# Altium PCB ProyectoIntegrador.PcbDoc
Units mil, origin at the board's own origin, x right, y up, seen from the top; angles counter-clockwise.
Board outline 3937 x 4133.68 mil, 2 copper layers (Top Layer, Bottom Layer); 63 components, 66 nets, 245 pads, 28 vias.
Unrouted connection lines stored in the file: 34.
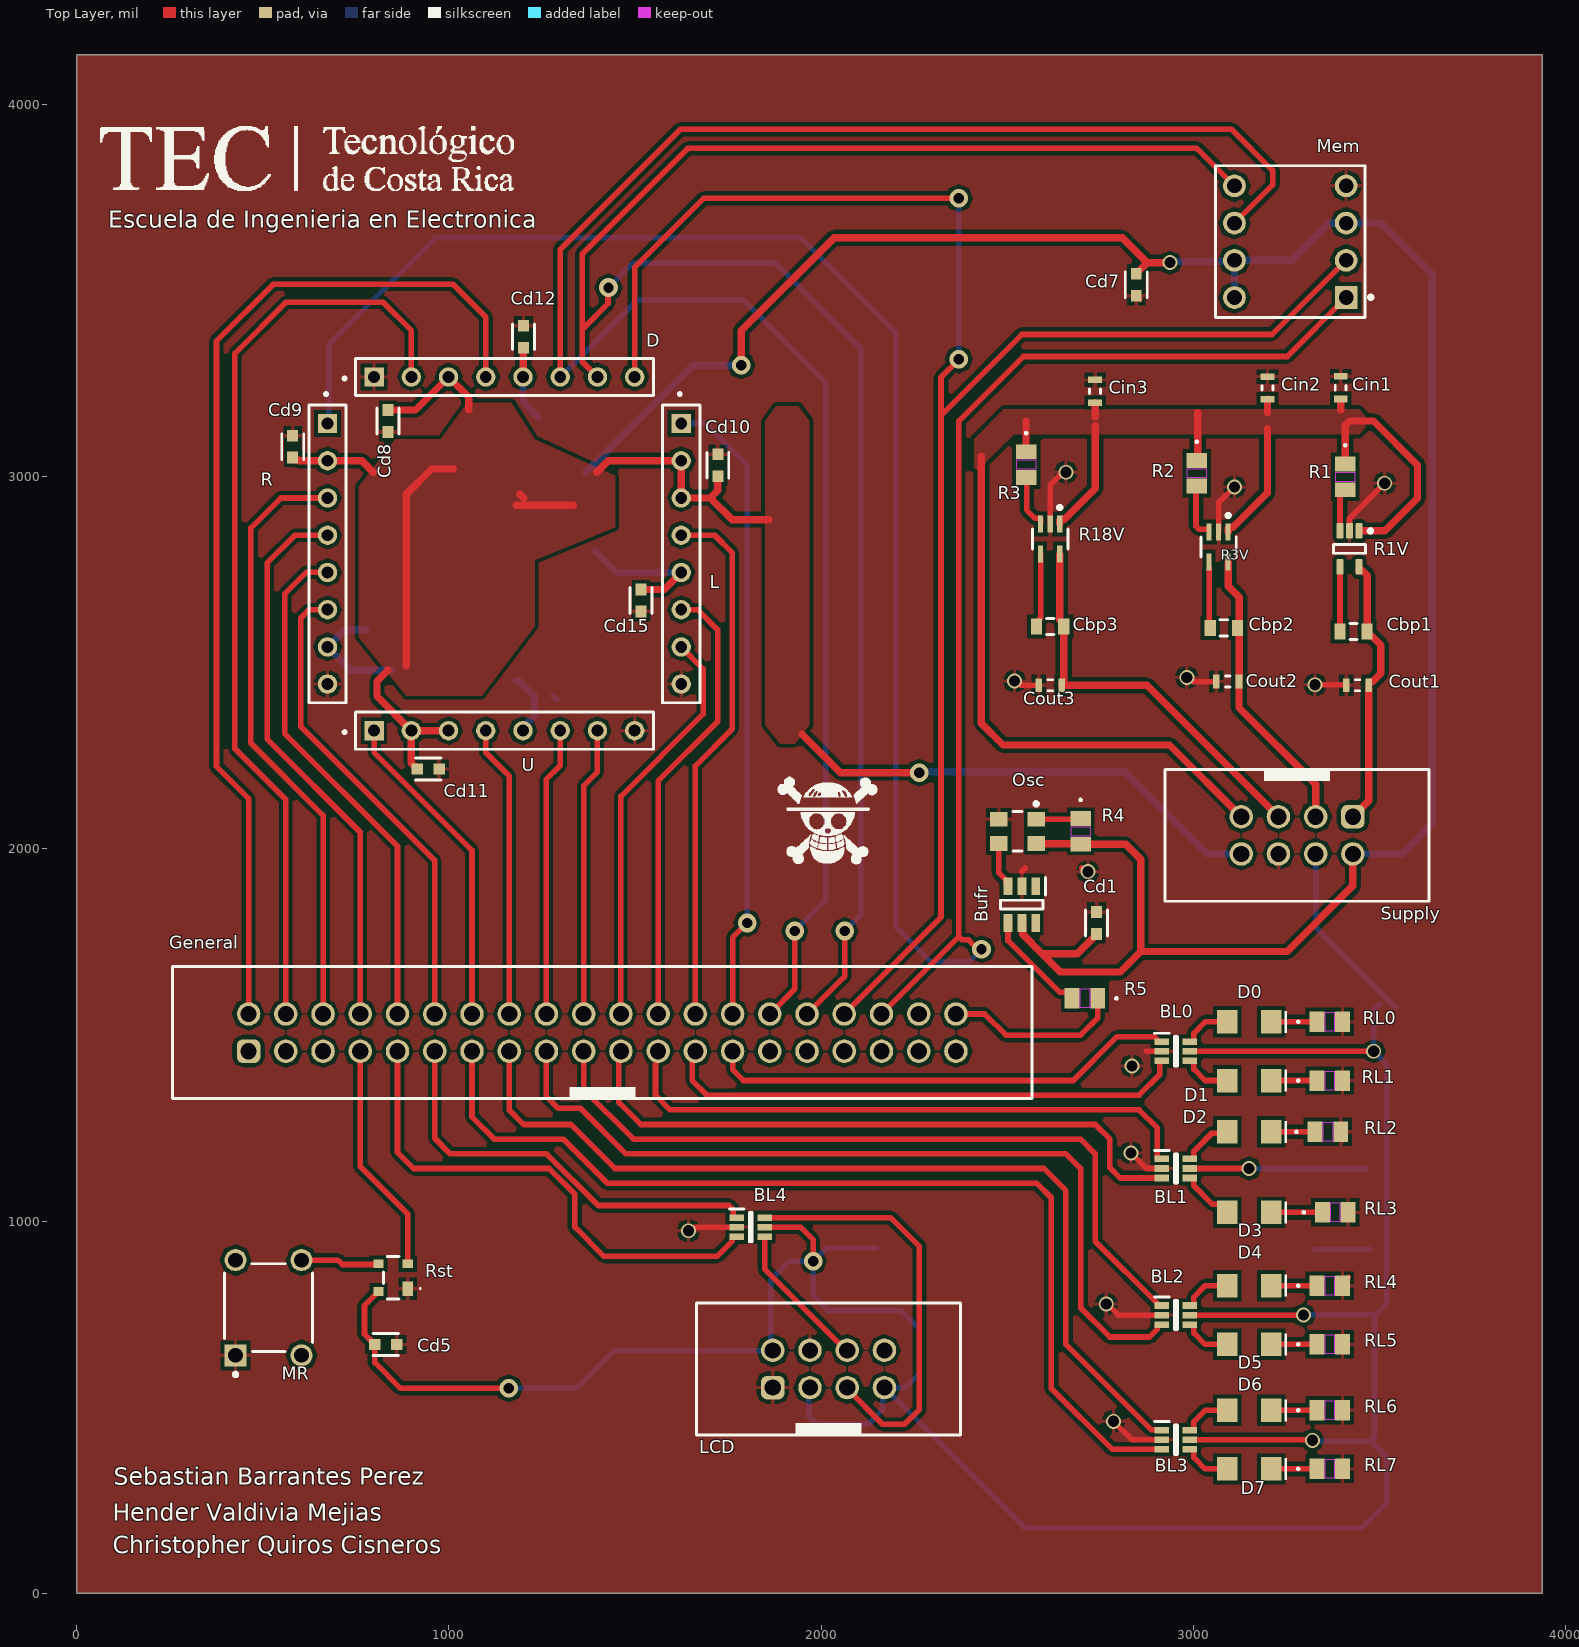
[diagram p0: Top Layer view]
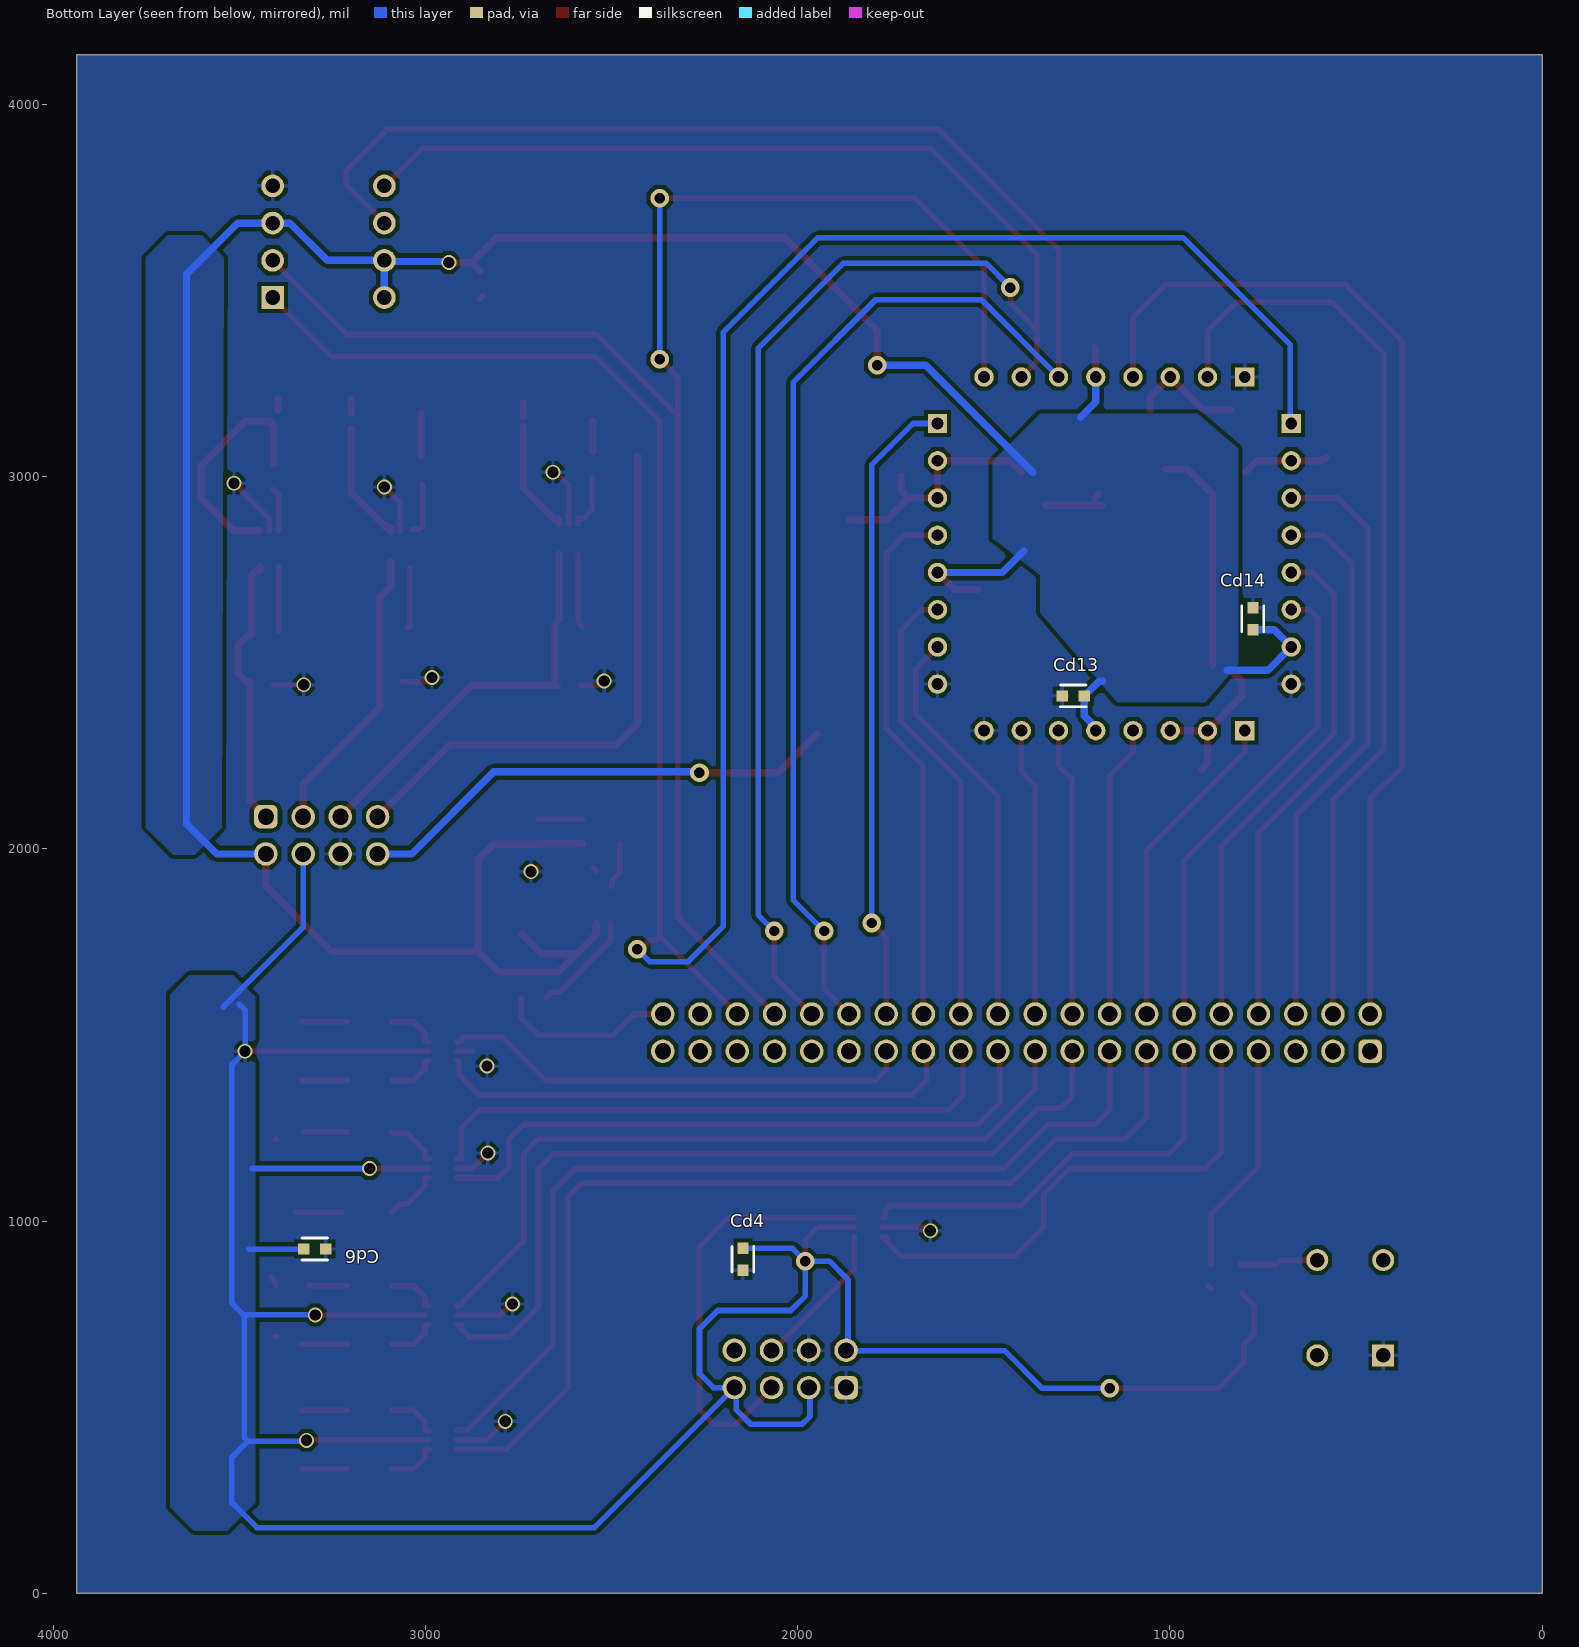
[diagram p1: Bottom Layer view, seen from below]
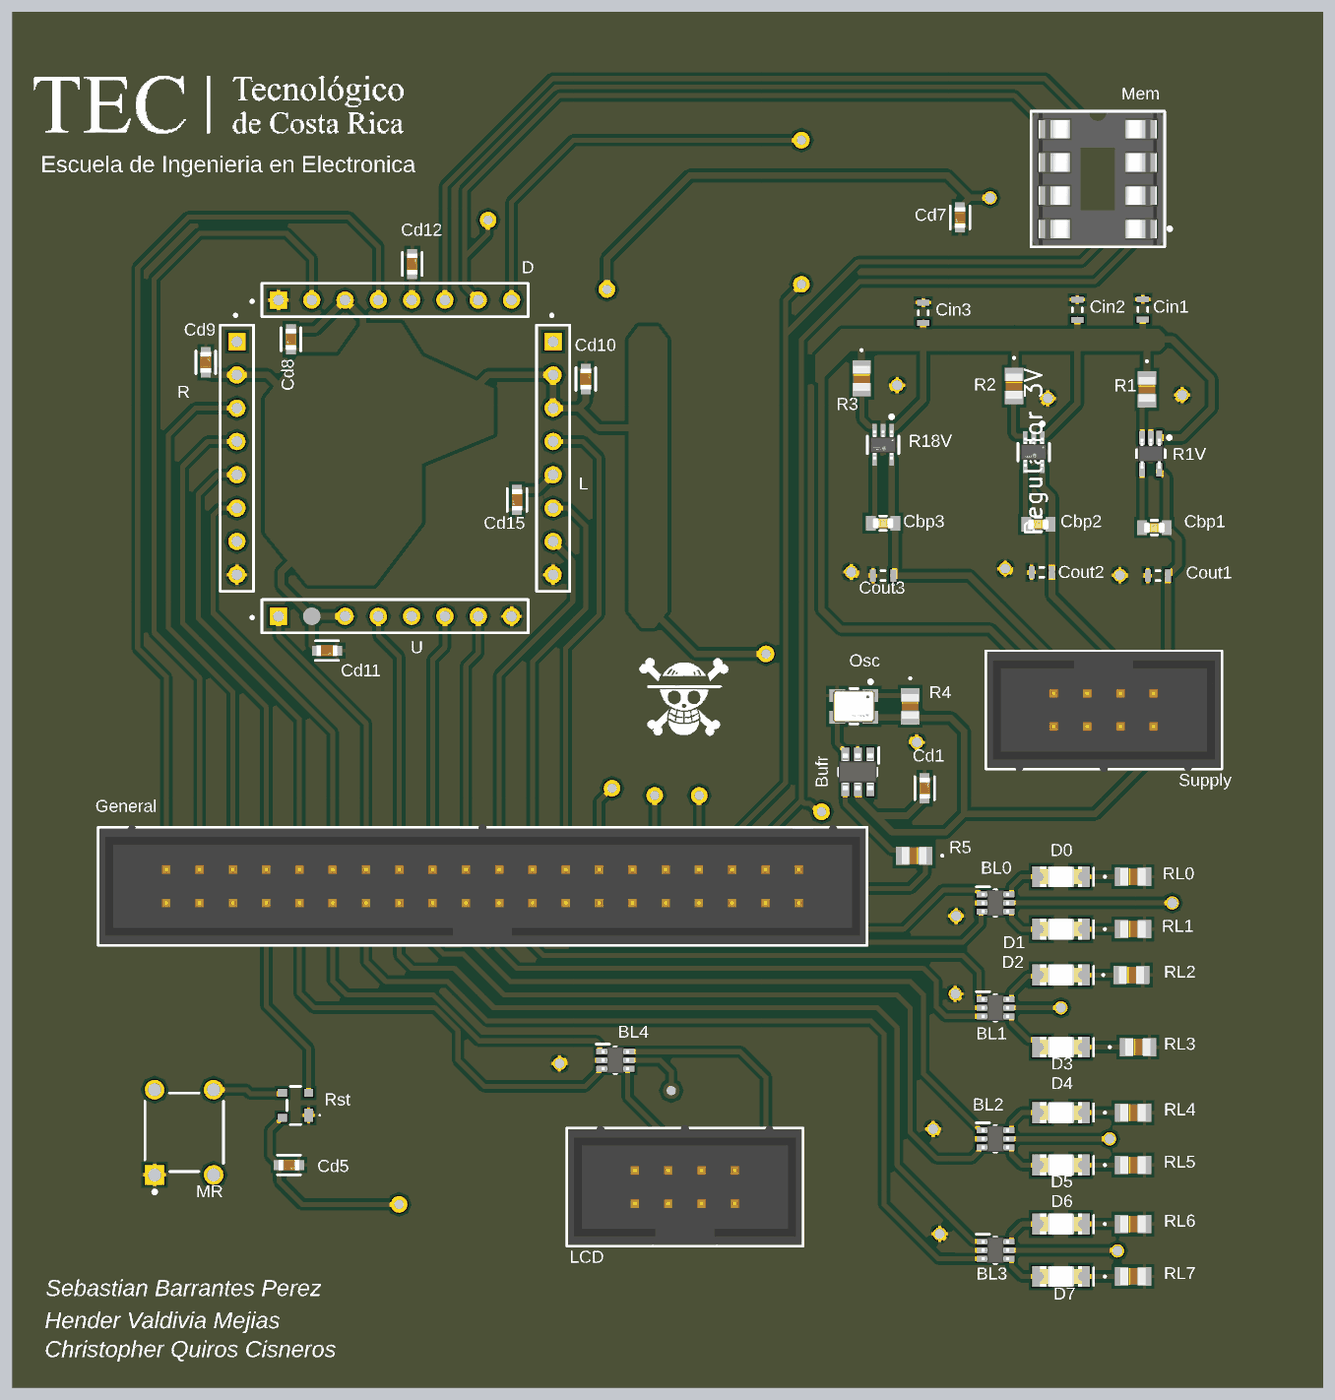
[diagram p2: 3D render of the assembled board from above, using the file's embedded part models]
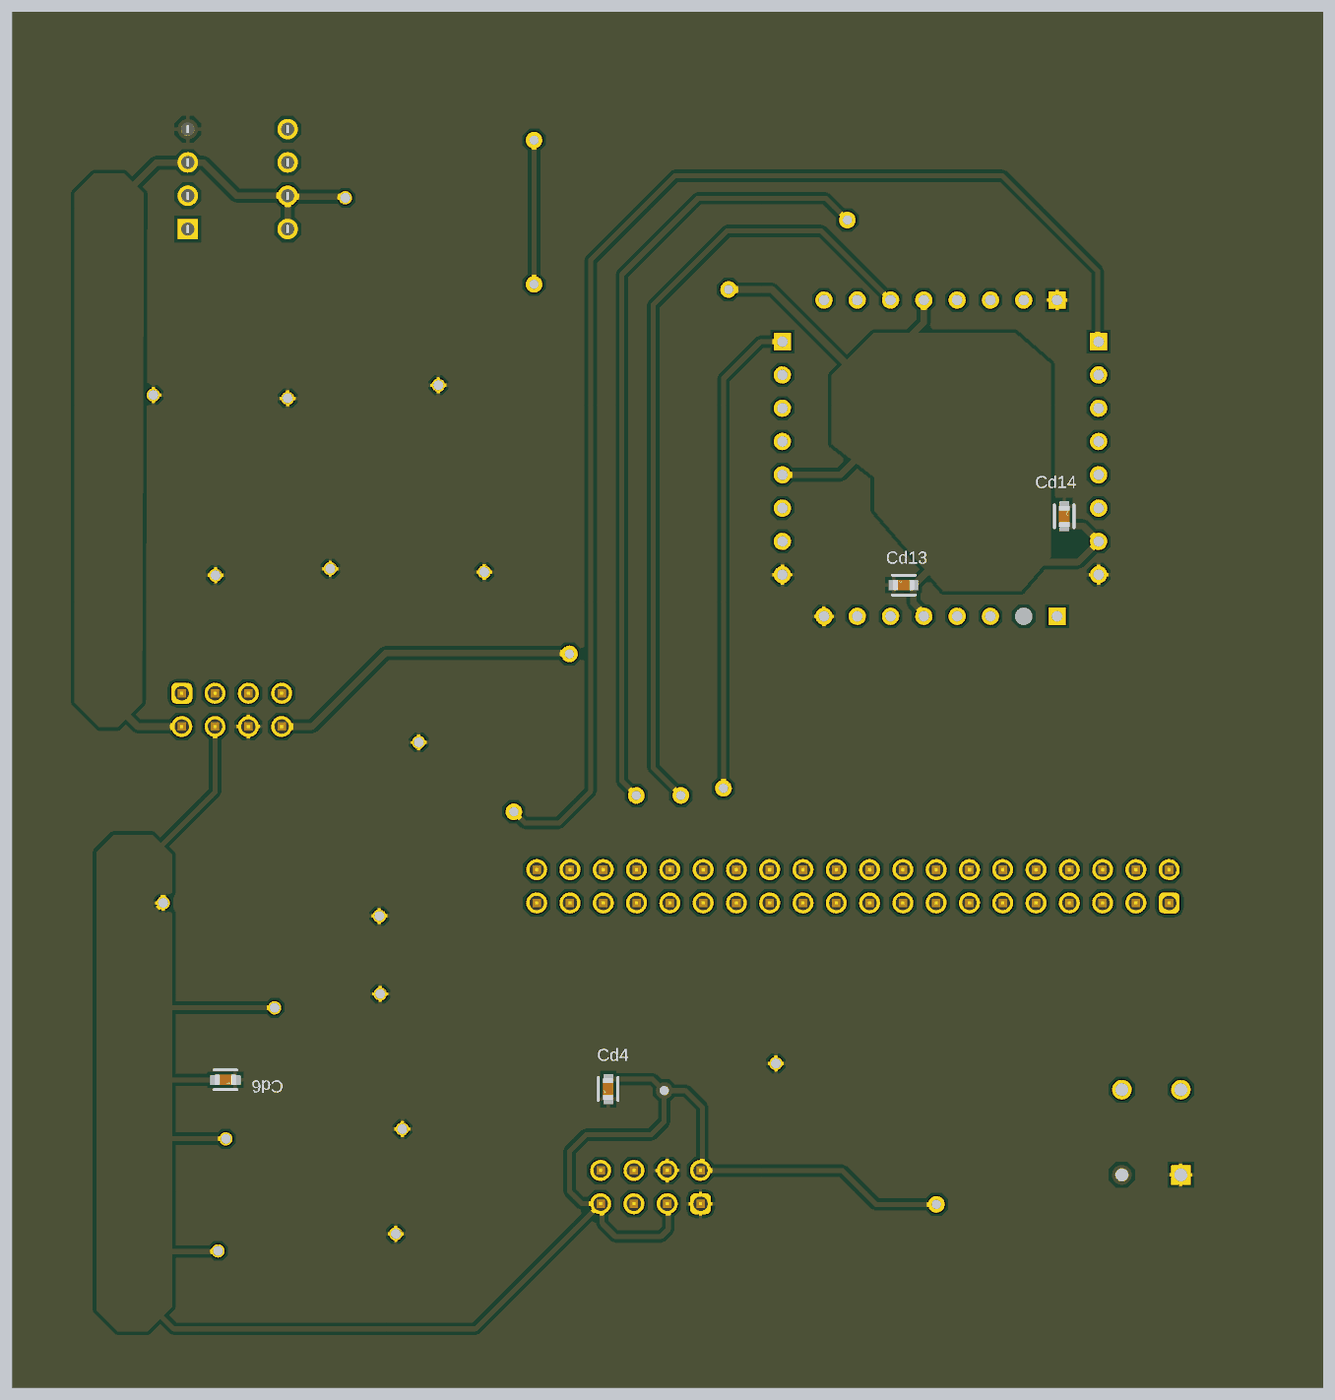
[diagram p3: 3D render of the assembled board from below, using the file's embedded part models]

## Layer stack, top to bottom
Top Solder: solder mask 1, SM-001, Dk 4
Top Layer: signal copper 1.378
Dielectric 1: dielectric 12.6, FR-4, Dk 4.8
Bottom Layer: signal copper 1.378
Bottom Solder: solder mask 1, SM-001, Dk 4

## Board outline
0,0.18 3937,0.18 3937,4133.86 0,4133.86

## Design rules (kind name [scope] priority, off if disabled: settings)
AssemblyTestPointUsage [All] p1: isadvanced=TRUE
AssemblyTestpoint [All] p1: isadvanced=TRUE testpointundercomponent=TRUE minsize=40 maxsize=100 preferedsize=60 minholesize=0 maxholesize=40 preferedholesize=32 testpointgrid=1 usegrid=TRUE gridtolerance=0.01 allowsidetop=TRUE allowsidebottom=TRUE
Clearance Clearance_4 [InNamedPolygon('GND_L02_P017')] p1: isadvanced=TRUE gap=10 ignorepadtopadclearanceinfootprint=TRUE
Clearance Clearance_3 [InNamedPolygon('GND_L01_P020')] p2: isadvanced=TRUE gap=10 ignorepadtopadclearanceinfootprint=TRUE
Clearance Clearance_2 [InNamedPolygon('GND_L02_P002')] p3: isadvanced=TRUE gap=10 ignorepadtopadclearanceinfootprint=FALSE
Clearance Clearance_1 [InNamedPolygon('GND_L01_P012')] p4: isadvanced=TRUE gap=10 ignorepadtopadclearanceinfootprint=TRUE
Clearance Clearance_1 [OnMid vs OnMid] p5: gap=8 ignorepadtopadclearanceinfootprint=FALSE except(2: SMDPad-Fill SMDPad-Poly SMDPad-Region; 5: SMDPad-SMDPad) sourcerule=45 cellrowname=All cellrowtype=0 cellcolname=All cellcoltype=0 innerlayers=TRUE
Clearance Clearance_2 [(ExistsOnLayer('Top Layer') Or ExistsOnLayer('Bottom Layer')) vs (ExistsOnLayer('Top Layer') Or ExistsOnLayer('Bottom Layer'))] p6: gap=8 ignorepadtopadclearanceinfootprint=FALSE except(2: SMDPad-Fill SMDPad-Poly SMDPad-Region; 5: SMDPad-SMDPad) sourcerule=45 cellrowname=All cellrowtype=0 cellcolname=All cellcoltype=0 outerlayers=TRUE
Clearance [All] p7: gap=10 ignorepadtopadclearanceinfootprint=FALSE ismatrix=TRUE
ComponentClearance [All] p1: isadvanced=TRUE gap=10 collisioncheckmode=3 verticalgap=10 showdistances=FALSE
FabricationTestPointUsage [All] p1: isadvanced=TRUE valid=0 allowmultiple=FALSE
FabricationTestpoint [All] p1: isadvanced=TRUE side=3 testpointundercomponent=TRUE minsize=40 maxsize=100 preferedsize=60 minholesize=0 maxholesize=40 preferedholesize=32 testpointgrid=1 allowsidetop=TRUE allowsidebottom=TRUE usegrid=TRUE gridtolerance=0.01
FanoutControl Fanout_BGA [IsBGA] p1: isadvanced=TRUE bgadir=Out bgaviamode=Centered fanoutstyle=Auto fanoutdirection=Alternating viagrid=1 // Fanout_BGA (Default Rule)
FanoutControl Fanout_LCC [IsLCC] p2: isadvanced=TRUE bgadir=Out bgaviamode=Centered fanoutstyle=Auto fanoutdirection=Alternating viagrid=1 // Fanout_LCC (Default Rule)
FanoutControl Fanout_SOIC [IsSOIC] p3: isadvanced=TRUE bgadir=Out bgaviamode=Centered fanoutstyle=Auto fanoutdirection=Alternating viagrid=1 // Fanout_SOIC (Default Rule)
FanoutControl Fanout_Small [(CompPinCount < 5)] p4: isadvanced=TRUE bgadir=Out bgaviamode=Centered fanoutstyle=Auto fanoutdirection=OutThenIn viagrid=1 // Fanout_Small (Default Rule)
FanoutControl Fanout_Default [All] p5: isadvanced=TRUE bgadir=Out bgaviamode=Centered fanoutstyle=Auto fanoutdirection=Alternating viagrid=1 // Fanout_Default (Default Rule)
Height [All] p1: isadvanced=TRUE minheight=0 maxheight=1000 prefheight=500
HoleSize [All] p1: isadvanced=TRUE absolutevalues=TRUE maxlimit=100 minlimit=12 maxpercent=80.000 minpercent=20.000
HoleToHoleClearance [All] p1: isadvanced=TRUE gap=10 allowstackedmicrovias=TRUE
LayerPairs [All] p1: isadvanced=TRUE enforce=TRUE
MinimumSolderMaskSliver [All] p1: isadvanced=TRUE minsoldermaskwidth=5
NetAntennae [All] p1: isadvanced=TRUE netantennaetolerance=0
PasteMaskExpansion [All] p1: isadvanced=TRUE expansion=0
PlaneClearance [All] p1: isadvanced=TRUE clearance=20
PlaneConnect [All] p1: isadvanced=TRUE planeconnectstyle=Relief reliefexpansion=20 reliefentries=4 reliefconductorwidth=10 reliefairgap=10
PolygonConnect [All] p1: connectstyle=Relief reliefconductorwidth=10 reliefentries=4 polygonreliefangle="90 Angle" airgapwidth=10
RoutingCorners [All] p1: isadvanced=TRUE cornerstyle=45-Degree minsetback=100 maxsetback=100
RoutingPriority [All] p1: isadvanced=TRUE routingpriority=0
RoutingVias [All] p1: holewidth=30 width=40 viastyle="Through Hole" minholewidth=30 minwidth=40 maxholewidth=30 maxwidth=40
ShortCircuit [All] p1: isadvanced=TRUE allowed=FALSE
SilkToSilkClearance [All] p1: isadvanced=TRUE silktosilkclearance=10
SilkToSolderMaskClearance [IsPad] p1: isadvanced=TRUE minsilkscreentomaskgap=2 clearancetoexposedcopper=TRUE
SolderMaskExpansion [All] p1: isadvanced=TRUE expansion=4 istentingtop=FALSE
SupplyNets "Schematic Supply Nets_4" [InNet('VDD30')] p1: isadvanced=TRUE voltage=0.000
SupplyNets "Schematic Supply Nets_3" [InNet('VDD18')] p2: isadvanced=TRUE voltage=0.000
SupplyNets "Schematic Supply Nets_2" [InNet('GND')] p3: isadvanced=TRUE voltage=0.000
SupplyNets "Schematic Supply Nets_1" [InNet('VDD10')] p4: isadvanced=TRUE voltage=0.000
UnRoutedNet [All] p1: isadvanced=TRUE
UnpouredPolygon [All] p1: isadvanced=TRUE
Width "Schematic Width Constraint" [InNetClass('Alimentacion')] p1: maxlimit=60 minlimit=15 preferedwidth=19.68 minimp=50.000000 maximp=50.000000 favimp=50.000000
Width [All] p2: maxlimit=15 minlimit=12 preferedwidth=15 minimp=50.000000 maximp=50.000000 favimp=50.000000
4 further rules are at their usual default settings.

## Classes and differential pairs
net class Alimentacion: NetAlimentacion_1 NetAlimentacion_3 NetAlimentacion_5 VDD10 VDD18 VDD30 Vin

## Components (designator, comment, footprint, x,y, rotation, side; value= is the part's Value field where it differs from the comment)
BL0 "74LVC2G17GW,125" SOT65P210X110-6N 2952.76,1456.69 r0 top
BL1 "74LVC2G17GW,125" SOT65P210X110-6N 2952.76,1141.73 r0 top
BL2 "74LVC2G17GW,125" SOT65P210X110-6N 2952.76,748.03 r0 top
BL3 "74LVC2G17GW,125" SOT65P210X110-6N 2952.76,413.39 r0 top
BL4 "74LVC2G17GW,125" SOT65P210X110-6N 1811.02,984.25 r0 top
Bufr "PL133-37TI" SOT95P280X145-6N 2539.37,1850.39 r270 top (schematic designator Buffer_CLK)
Cbp1 "10nF" FP-CGA3E-0_3-0_1-IPC_B 3430.24,2584.02 r0 top
Cbp2 "10nF" FP-CGA3E-0_3-0_1-IPC_B 3081.69,2593.86 r0 top
Cbp3 "10nF" FP-CGA3E-0_3-0_1-IPC_B 2615.35,2597.24 r0 top
Cd1 "0.1uF" FP-0603-L_1_6_0_15-W_0_81-MFG 2740.16,1801.18 r90 top
Cd4 "0.1uF" FP-0603-L_1_6_0_15-W_0_81-MFG 2147.4,897.64 r270 bottom
Cd5 "0.1uF" FP-0603-L_1_6_0_15-W_0_81-MFG 830.71,669.29 r0 top
Cd6 "0.1uF" FP-0603-L_1_6_0_15-W_0_81-MFG 3297.24,925.2 r180 bottom
Cd7 "0.1uF" FP-0603-L_1_6_0_15-W_0_81-MFG 2846.46,3515.75 r270 top
Cd8 "0.1uF" FP-0603-L_1_6_0_15-W_0_81-MFG 836.61,3149.61 r270 top
Cd9 "0.1uF" FP-0603-L_1_6_0_15-W_0_81-MFG 580.71,3080.71 r90 top
Cd10 "0.1uF" FP-0603-L_1_6_0_15-W_0_81-MFG 1722.44,3030.51 r90 top
Cd11 "0.1uF" FP-0603-L_1_6_0_15-W_0_81-MFG 944.88,2214.57 r0 top
Cd12 "0.1uF" FP-0603-L_1_6_0_15-W_0_81-MFG 1200.79,3375.98 r90 top
Cd13 "0.1uF" FP-0603-L_1_6_0_15-W_0_81-MFG 1259.84,2411.42 r0 bottom
Cd14 "0.1uF" FP-0603-L_1_6_0_15-W_0_81-MFG 777.56,2618.11 r90 bottom
Cd15 "0.1uF" FP-0603-L_1_6_0_15-W_0_81-MFG 1515.75,2667.32 r270 top
Cin1 "1uF" CAPC1609X100X15LL20 3395.67,3239.17 r270 top
Cin2 "1uF" CAPC1609X100X15LL20 3198.82,3238.19 r270 top
Cin3 "1uF" CAPC1609X100X15LL20 2736.22,3229.33 r270 top
Cout1 "1uF" CAPC1609X100X15LL20 3440.95,2439.76 r0 top
Cout2 "1uF" CAPC1609X100X15LL20 3091.93,2449.61 r0 top
Cout3 "1uF" CAPC1609X100X15LL20 2615.35,2439.76 r0 top
D "PPTC081LFBN-RC" SAMTEC_TS-108-X-A-1#1 1149.21,3267.72 r0 top (schematic designator SIWA_D)
D0 "150120BS75000" WL-SMCW_1206_150120xx75000 3149.61,1535.43 r180 top
D1 "150120BS75000" WL-SMCW_1206_150120xx75000 3149.61,1377.95 r180 top
D2 "150120BS75000" WL-SMCW_1206_150120xx75000 3149.61,1240.16 r180 top
D3 "150120BS75000" WL-SMCW_1206_150120xx75000 3149.61,1023.62 r180 top
D4 "150120BS75000" WL-SMCW_1206_150120xx75000 3149.61,826.77 r180 top
D5 "150120BS75000" WL-SMCW_1206_150120xx75000 3149.61,669.29 r180 top
D6 "150120BS75000" WL-SMCW_1206_150120xx75000 3149.61,492.13 r180 top
D7 "150120BS75000" WL-SMCW_1206_150120xx75000 3149.61,334.65 r180 top
General "Header General" 61204021621 1412.2,1506.69 r0 top (schematic designator P1)
L "PPTC081LFBN-RC" SAMTEC_TS-108-X-A-1#1 1624.21,2792.72 r270 top (schematic designator SIWA_L)
LCD "61200821621" 61200821621 2020.08,603.15 r0 top
Mem "1-2199298-2" FP-1-2199298-2-MFG 3260.24,3631.1 r90 top (schematic designator MemorySocket)
MR "B3F-1000" OMRON-B3F-1000-4_V 515.75,767.72 r90 top
Osc "ASE3-20.000MHZ-KT" FP-ASE3-MFG 2527.56,2047.24 r180 top (schematic designator Oscilador)
R "PPTC081LFBN-RC" SAMTEC_TS-108-X-A-1#1 674.21,2792.72 r270 top (schematic designator SIWA_R)
R1 "100k" RES_PEP0805-N_VIS 3407.9,2999.42 r270 top
R1V "TPS71710DCKT" DCK0005A_M 3419.29,2806.1 r270 top (schematic designator "Regulador 1V")
R2 "100k" RES_PEP0805-N_VIS 3008.84,3009.26 r270 top
R3 "100k" RES_PEP0805-N_VIS 2550.7,3032.48 r270 top
R3V "MAX8510EXK30+T" FP-X5-1-MFG 3067.79,2811.02 r270 top (schematic designator "Regulador 3V")
R4 "100k" RES_PEP0805-N_VIS 2696.85,2047.24 r270 top
R5 "50" RES_PEP0805-N_VIS 2708.66,1598.43 r180 top
R18V "MAX8510EXK18+T" FP-X5-1-MFG 2615.35,2832.48 r270 top (schematic designator "Regulador 1.8V")
RL0 "50" RES_PEP0805-N_VIS 3366.14,1535.43 r0 top
RL1 "50" RES_PEP0805-N_VIS 3366.14,1377.95 r0 top
RL2 "50" RES_PEP0805-N_VIS 3361.27,1240.16 r0 top
RL3 "50" RES_PEP0805-N_VIS 3380.96,1023.62 r0 top
RL4 "50" RES_PEP0805-N_VIS 3366.14,826.77 r0 top
RL5 "50" RES_PEP0805-N_VIS 3366.14,669.29 r0 top
RL6 "50" RES_PEP0805-N_VIS 3366.14,492.13 r0 top
RL7 "50" RES_PEP0805-N_VIS 3366.14,334.65 r0 top
Rst "APX812-29UG-7" APX81229UG7 850.39,848.43 r90 top (schematic designator Reset)
Supply "61200821621" 61200821621 3278.35,2036.61 r180 top (schematic designator Alimentacion)
U "PPTC081LFBN-RC" SAMTEC_TS-108-X-A-1#2 1149.21,2317.72 r0 top (schematic designator SIWA_U)

## Footprints (in the part's own frame and the unit in brackets; to place one, negate y for a bottom-side part, rotate by r counter-clockwise, add the part's x,y. Pads: shape width x height; smd on the part's side, far side on the other; paste and mask are expansions set on the pad)
61200821621 [mm] "8 pins, straight, gold plating"
  rrect50% 1.6x1.6 hole 1.1: 1(-3.81,-1.27)
  round 1.6 hole 1.1: 2(-3.81,1.27) 3(-1.27,-1.27) 4(-1.27,1.27) 5(1.27,-1.27) 6(1.27,1.27) 7(3.81,-1.27) 8(3.81,1.27)
  silkscreen extent -9.01,-4.5 9.01,4.5, body extent -8.91,-4.42 8.91,4.75, height 9.13
61204021621 [mm] "40 pins, straight, gold plating"
  rrect50% 1.6x1.6 hole 1.1: 1(-24.13,-1.27)
  round 1.6 hole 1.1: 2(-24.13,1.27) 3(-21.59,-1.27) 4(-21.59,1.27) 5(-19.05,-1.27) 6(-19.05,1.27) 7(-16.51,-1.27) 8(-16.51,1.27) 9(-13.97,-1.27) 10(-13.97,1.27) 11(-11.43,-1.27) 12(-11.43,1.27) 13(-8.89,-1.27) 14(-8.89,1.27) 15(-6.35,-1.27) 16(-6.35,1.27) 17(-3.81,-1.27) 18(-3.81,1.27) 19(-1.27,-1.27) 20(-1.27,1.27) 21(1.27,-1.27) 22(1.27,1.27) 23(3.81,-1.27) 24(3.81,1.27) 25(6.35,-1.27) 26(6.35,1.27) 27(8.89,-1.27) 28(8.89,1.27) 29(11.43,-1.27) 30(11.43,1.27) 31(13.97,-1.27) 32(13.97,1.27) 33(16.51,-1.27) 34(16.51,1.27) 35(19.05,-1.27) 36(19.05,1.27) 37(21.59,-1.27) 38(21.59,1.27) 39(24.13,-1.27) 40(24.13,1.27)
  silkscreen extent -29.33,-4.5 29.33,4.5, body extent -29.23,-4.42 29.23,4.75, height 9.13
APX81229UG7 [mm]
  rect 1x0.7 smd: 1(-0.75,-1)
  rect 0.6x0.7 smd: 2(0.95,-1) 3(0.95,1) 4(-0.95,1)
  silkscreen extent -1.45,-1.9 1.45,0.65
CAPC1609X100X15LL20 [mm] "Chip Capacitor, 2-Leads, Body 1.60x0.85mm, IPC High Density"
  rect 0.45x0.95 smd: 1(-0.775,0) 2(0.775,0)
  silkscreen extent -0.15,-0.38 0.15,0.38, body extent -0.9,-0.53 0.9,0.53, height 1
DCK0005A_M [mm] "SOT23, 5-Leads, Body 2.15x1.4mm, Pitch 0.65mm, IPC Low Density"
  rrect22% 1.05x0.45 smd: 1(-1.225,0.65) 2(-1.225,0) 3(-1.225,-0.65) 4(1.225,-0.65) 5(1.225,0.65)
  silkscreen extent -1.35,-1.1 0.3,1.55, body extent -1.14,-1 1.14,1, height 0.94
FP-1-2199298-2-MFG [mm]
  rect 1.55x1.55 hole 1 paste-2539.97 mask+0: 1(-3.81,-3.81)
  round 1.55 hole 1 paste-2539.97 mask+0: 2(-1.27,-3.81) 3(1.27,-3.81) 5(3.81,3.81) 6(1.27,3.81) 8(-3.81,3.81)
  round 1.55 hole 1 paste-2539.97 mask+0.3: 4(3.81,-3.81)
  round 1.55 hole 1 mask+0.102: 7(-1.27,3.81)
  silkscreen extent -5.18,-5.62 5.18,5.1, body extent -5.28,-5.2 5.28,5.2, height 0.25
FP-0603-L_1_6_0_15-W_0_81-MFG [mm]
  rect 0.8x0.75 smd paste+0 mask+0: 1(-0.75,0) 2(0.75,0)
  silkscreen extent -0.87,-0.75 0.87,0.75, body extent -1.25,-0.58 1.25,0.58, height 0.25
FP-ASE3-MFG [mm]
  rect 1.2x1 smd paste+0 mask+0: 1(-1.27,-0.825) 2(1.27,-0.825) 3(1.27,0.825) 4(-1.27,0.825)
  silkscreen extent -1.4,-2 0.3,1.35, body extent -1.97,-1.45 1.97,1.45, height 0.25
FP-CGA3E-0_3-0_1-IPC_B [mm]
  rect 0.756x1.106 smd paste+0 mask+0: 1(-0.925,0) 2(0.925,0)
  silkscreen extent -0.25,-0.55 0.25,0.55, body extent -1.55,-0.8 1.55,0.8, height 0.25
FP-X5-1-MFG [mm]
  rect 1.15x0.35 smd paste+0 mask+0: 1(-1.025,0.65) 2(-1.025,0) 3(-1.025,-0.65) 4(1.025,-0.65) 5(1.025,0.65)
  silkscreen extent -2.27,-1.2 0.67,1.2, body extent -1.7,-1.2 1.7,1.2, height 0.25
OMRON-B3F-1000-4_V [mm] "TH, 4-Leads, Body 6x6mm"
  rect 1.5x1.5 hole 1 paste-2539.97: 1(-3.25,2.25)
  round 1.5 hole 1 paste-2539.97: 2(3.25,2.25) 4(3.25,-2.25)
  round 1.5 hole 1 paste-2539.97 mask+0.102: 3(-3.25,-2.25)
  silkscreen extent -4.67,-3 3,3, body extent -3,-3 3,3, height 4.5
RES_PEP0805-N_VIS [mil]
  rect 40x55 smd paste+0 mask+0: 1(-34.5,0) 2(34.5,0)
  Top Layer keep-out region: -12.5,-25.5 -12.5,25.5 12.5,25.5 12.5,-25.5
  silkscreen extent -87,-3 -82,3, body extent -37,-25 37,25, height 25
SAMTEC_TS-108-X-A-1#1 [mil]
  rect 52x52 / inner round 52 / far side rect 52x52 hole 32: 01(-350,0)
  round 52 hole 32: 02(-250,0) 03(-150,0) 04(-50,0) 05(50,0) 06(150,0) 07(250,0) 08(350,0)
  silkscreen extent -433,-50 400,50
SAMTEC_TS-108-X-A-1#2 [mil]
  rect 52x52 / inner round 52 / far side rect 52x52 hole 32: 01(-350,0)
  round 52 hole 32 paste-99999 mask-99999: 02(-250,0)
  round 52 hole 32: 03(-150,0) 04(-50,0) 05(50,0) 06(150,0) 07(250,0) 08(350,0)
  silkscreen extent -433,-50 400,50
SOT65P210X110-6N [mm]
  rect 1x0.45 smd: 1(-0.95,0.65) 2(-0.95,0) 3(-0.95,-0.65) 4(0.95,-0.65) 5(0.95,0) 6(0.95,0.65)
  silkscreen extent -1.45,-1 0.1,1.22, body extent -1.05,-1 1.05,1, height 1.1
SOT95P280X145-6N [mm]
  rect 1.2x0.6 smd: 1(-1.25,0.95) 2(-1.25,0) 3(-1.25,-0.95) 4(1.25,-0.95) 5(1.25,0) 6(1.25,0.95)
  silkscreen extent -1.85,-1.45 0.3,1.6, body extent -1.4,-1.45 1.4,1.45, height 1.45
WL-SMCW_1206_150120xx75000 [mm] "SMD Mono-color Chip LED, body 3.2x1.6mm"
  rect 1.4x1.6 smd: 1(-1.5,0) 2(1.5,0)
  silkscreen extent -2.6,-0.75 -2.4,0.75, body extent -1.6,-0.8 1.6,0.8, height 0.68

## Part data
BL0 BL1 BL2 BL3 BL4: "Integrated Circuit", Manufacturer_Name=Nexperia, Mouser Part Number=771-LVC2G17GW125, Arrow Part Number=74LVC2G17GW,125, Arrow Price/Stock=https://www.arrow.com/en/products/74lvc2g17gw125/nexperia?utm_currency=USD&region=nac, Datasheet Link=https://assets.nexperia.com/documents/data-sheet/74LVC2G17.pdf, Height=1.1mm, Manufacturer_Part_Number=74LVC2G17GW,125, Mouser Price/Stock=https://www.mouser.co.uk/ProductDetail/Nexperia/74LVC2G17GW125?qs=me8TqzrmIYUC6E0%2FnH98oA%3D%3D
Bufr: "Integrated Circuit", Manufacturer_Name=Microchip, Mouser Part Number=998-PL133-37TI, Arrow Part Number=PL133-37TI, Arrow Price/Stock=https://www.arrow.com/en/products/pl133-37ti/microchip-technology?utm_currency=USD&region=nac, Datasheet Link=http://www.microchip.com/mymicrochip/filehandler.aspx?ddocname=en580976, Height=1.45mm, Manufacturer_Part_Number=PL133-37TI, Mouser Price/Stock=https://www.mouser.co.uk/ProductDetail/Microchip-Technology/PL133-37TI?qs=kh6iOki%2FeLE%2FQlQVb6vWpw%3D%3D
Cbp1 Cbp2 Cbp3: library part CMP-08246-000560-1, "Cap Ceramic 10nF 100V C0G 5% Pad SMD 0603 +125°C Automotive T/R", Case Code (Imperial)=0603, Case Code (Metric)=1608, Dielectric=C0G, Max Operating Temperature=125°C, Min Operating Temperature=-55°C, Package Quantity=4000, Ratings=AEC-Q200, Tolerance=5%, Voltage Rating=100V, Capacitance=10nF, Case/Package=0603, Composition=Ceramic, Height=0.8mm, Lead Free="Lead Free", Length=0.063inch, Mount="Surface Mount", Packaging="Tape and Reel", Termination=SMD/SMT, Thickness=0.035inch, Voltage Rating (DC)=100V, Weight=7.1E-05oz, Width=0.031inch
Cd1 Cd4 Cd5 Cd6 Cd7 Cd8 Cd9 Cd10 Cd11 Cd12 Cd13 Cd14 Cd15: library part CMP-07738-136560482-1, "KGM15BR71H104JT Cap Cer 0.1UF 50V X7R 0603", Capacitance=100nF, Case/Package=0603, Max Operating Temperature=125°C, Min Operating Temperature=-55°C, Tolerance=5%, Voltage Rating=50V, Height=940µm, Material=Ceramic, NexarPartId=136560482
Cin1 Cin2 Cin3 Cout1 Cout2 Cout3: library part CMP-2006-00183-1, Manufacturer="AVX Interconnect / Elco", Part Number=TACL105K006XTA
D L R U: "Description", Manufacturer_Name=Sullins, Copyright="Copyright (C) 2025 Ultra Librarian. All rights reserved.", Manufacturer_Part_Number=PPTC081LFBN-RC, RefDes=RefDes, Type=Type
D0 D1 D2 D3 D4 D5 D6 D7: library part CMP-1426-00015-3, "WL-SMCW SMT Mono-Color Chip LED Waterclear", Case Code (Imperial)=1206, Case Code (Metric)=3216, Color=Blue, Forward Current=100mA, Forward Voltage=3.2V, Manufacturer Package Identifier=LED_1206, Max Operating Temperature=85°C, Max Reverse Voltage (DC)=5V, Min Operating Temperature=-40°C, Test Current=20mA, Case/Package=1206, Dominant Wavelength=470nm, Height=680µm, Length=3.2mm, Lens Style="Clear, Rectangular", Luminous Intensity=145mcd, Mount="Surface Mount", Packaging="Tape and Reel", Peak Wavelength=465nm, REACH SVHC=Unknown, RoHS=Compliant, Viewing Angle=140°, Wavelength=470nm, Width=1.6mm
General: library part CMP-1502-00015-3, Color=Black, Contact Resistance=20mΩ, Current Rating=3A, Insulation Resistance=1GΩ, Max Operating Temperature=105°C, Min Operating Temperature=-40°C, Operating Supply Voltage=250V, Connector Type="Male Pin", Contact Material=Copper, Contact Plating=Gold, Gender=Male, Height=9.25mm, Insulation Material=PBT, Lead Pitch=2.54mm, Length=58.46mm, Mount="Through Hole", NexarPartId=25903616, Number of Contacts=40, Number of Pins=40, Number of Positions=40, Number of Rows=2, Orientation=Vertical, Pitch=2.54mm, REACH SVHC=Unknown, RoHS=Compliant, Row Spacing=2.54mm, Termination=Solder, Voltage Rating=250V
LCD Supply: library part CMP-1502-00006-2, Color=Black, Contact Resistance=20mΩ, Current Rating=3A, Insulation Resistance=1GΩ, Max Operating Temperature=105°C, Min Operating Temperature=-40°C, Operating Supply Voltage=250V, Connector Type="Male Pin", Contact Material=Copper, Contact Plating=Gold, Gender=Male, Insulation Material=PBT, Lead Pitch=2.54mm, Length=17.82mm, Mount="Through Hole", NexarPartId=32855460, Number of Contacts=8, Number of Pins=8, Number of Positions=8, Number of Rows=2, Orientation=Vertical, Pitch=2.54mm, REACH SVHC=Unknown, RoHS=Compliant, Row Spacing=2.54mm, Termination=Solder
Mem: library part CMP-03370-000009-1, "CONN IC DIP SOCKET 8POS TIN", Color=Black, Contact Current Rating=1A, Contact Resistance=20mR, Flammability Rating="UL94 V-0", Insulation Resistance=1GR, Max Operating Temperature=105°C, Min Operating Temperature=-40°C, Package Quantity=60, Connector Type=Pin, Contact Finish - Mating=TIN, Contact Material=Bronze, Contact Plating=Tin, Contact Post Length=3inch, ELV=Compliant, Housing Material=PBT, Lead Free="Lead Free", Lead Pitch=2.54mm, Length=0.4inch, Mating Alignment="Yes (With)", Mount="Through Hole", Number of Contacts=8, Number of Positions=8, Number of Rows=2, Orientation=Straight, Packaging=Rail/Tube, Pitch=2.54mm, Radiation Hardening=No, RoHS Compliant=Yes, Row Spacing=0.3inch, Series="Diplomate DL", Termination="Through Hole"
MR: library part CMP-1677-00002-1, "Tactile Switch, SPST-NO, 0.05 A, 5 to 24 V, -25 to 70 degC, 4-Pin THD, RoHS, Bulk", Capacitance="-45 f", Current Rating="1.5 A", Max Operating Temperature="70 degC", Min Operating Temperature="-40 degC", Package Quantity=1080, Voltage Rating="150 V", ComponentLink1Description="Manufacturer URL", ComponentLink1URL=http://www.omron.com/, ComponentLink2Description=Datasheet, ComponentLink2URL=http://www.omron.com/ecb/products/pdf/en-b3f.pdf, Contact Material=Brass, Contact Plating=Gold, DatasheetVersion=Jan-15, Gender=Female, Height="14.99 mm", Lead Pitch="1.27 mm", Length="18.34 mm", Mount="Through Hole", PackageDescription="4-Pin Through Hole Device, Body 6 x 6 mm", PackageReference=B3F-1000, Packaging=Tray, Pins=8, Radiation Hardening=No, RoHSCompliant=true, Shielding=Shielded, Width="25.4 mm"
Osc: library part CMP-27762-010045-1, "XTAL OSC XO 20.0000MHZ CMOS SMD", Case/Package=SMD/SMT, Frequency=20MHz, Frequency Stability=30ppm, Load Capacitance=15pF, Max Operating Temperature=70°C, Max Supply Current=4mA, Max Supply Voltage=1.89V, Min Operating Temperature=-10°C, Min Supply Voltage=1.71V, Operating Supply Voltage=1.8V, Package Quantity=1000, Depth=2.5mm, Height=0.049inch, Lead Free="Lead Free", Length=3.2mm, Mount="Surface Mount", Number of Pins=4, Packaging="Tape and Reel", Radiation Hardening=No, Series=ASE3, Termination=SMD/SMT, Width=0.098inch
R1 R2 R3 R4 RL0 RL1 RL2 RL3 RL4 RL5 RL6 RL7: library part CMP-00030-123138495-1, "PEP0805Y1003BNTA Resistor High Precision Thin Film 0805 100k Ohm 0.1% 1/2W ±10ppm/°C Molded T/R", NexarPartId=123138495
R1V: library part CMP-0394-00843-2, "Single Output High PSRR LDO, 150 mA, Fixed 1 V Output, 2.5 to 6.5 V Input, with Low IQ, 5-pin SC70 (DCK), -40 to 85 degC, Green (RoHS & no Sb/Br)", Manufacturer="Texas Instruments", Accuracy(%)=3, Code_JEDEC=MO-203, ComponentLink1Description="Manufacturer URL", ComponentLink1URL=http://www.ti.com/, ComponentLink2Description=Datasheet, ComponentLink2URL=http://www.ti.com/general/docs/lit/getliterature.tsp?genericPartNumber=TPS71710&fileType=pdf, ComponentLink3Description="Package Specification", ComponentLink3URL=http://www.ti.com/litv/pdf/mpds025f, DatasheetVersion=SBVS068G, Eco-Plan="Green (RoHS & no Sb/Br)", Fixed Output Options(V)=1, Iout(Max)(A)=0.15, Iq(Typ)(mA)=0.05, Mounting Technology="Surface Mount", PackageDescription="5-Pin Plastic Small-Outline, Body 2 x 1.25 mm, Pitch 0.65 mm", PackageReference=DCK0005A, PackageVersion=4093553-3/G, PartNumber=TPS71710DCKT, SubFamily="Single Channel LDO", Vdo(Typ)(mV)=170, Vin(Max)(V)=6.5, Vin(Min)(V)=2.5, Vout Adj(Max)(V)=1, Vout Adj(Min)(V)=1
R3V: library part CMP-0246-00520-2, "IC REG LINEAR 3V 120MA SC70-5", Case/Package=SC, Dropout Voltage=120mV, Input Bias Current=40uA, Max Input Voltage=6V, Max Operating Temperature=85°C, Max Output Current=120mA, Max Power Dissipation=247mW, Min Current Limit=130mA, Min Input Voltage=2V, Min Operating Temperature=-40°C, Nominal Output Voltage=3V, Package Quantity=2500, Power Supply Rejection Ratio (PSRR)=54dB, Quiescent Current=90uA, Reference Voltage=1.225V, Accuracy=2%, Lead Free="Lead Free", Mount="Surface Mount", Number of Outputs=1, Number of Pins=5, Number of Regulators=1, Output Configuration=Positive, Output Current=120mA, Output Type=Fixed, Output Voltage=3V, Packaging="Tape and Reel", Polarity=Positive, Radiation Hardening=No, RoHS Compliant=Yes, Series=-
R5: library part CMP-00030-123138495-1, "PEP0805Y1003BNTA Resistor High Precision Thin Film 0805 50 Ohm 0.1% 1/2W ±10ppm/°C Molded T/R", NexarPartId=123138495
R18V: library part CMP-0246-00401-2, "IC REG LINEAR 1.8V 120MA SC70-5", Case/Package=SC, Input Bias Current=40uA, Max Input Voltage=6V, Max Operating Temperature=85°C, Max Output Current=120mA, Max Power Dissipation=247mW, Min Current Limit=130mA, Min Input Voltage=2V, Min Operating Temperature=-40°C, Nominal Output Voltage=1.8V, Package Quantity=2500, Power Supply Rejection Ratio (PSRR)=54dB, Quiescent Current=90uA, Reference Voltage=1.225V, Accuracy=2%, Lead Free="Lead Free", Mount="Surface Mount", Number of Outputs=1, Number of Pins=5, Number of Regulators=1, Output Configuration=Positive, Output Current=120mA, Output Type=Fixed, Output Voltage=1.8V, Packaging="Tape and Reel", Polarity=Positive, RoHS Compliant=Yes, Series=-
Rst: "I_O=20mA", Manufacturer_Name="Diodes Incorporated", Mouser Part Number=621-APX812-29UG-7, Arrow Part Number=APX812-29UG-7, Arrow Price/Stock=https://www.arrow.com/en/products/apx812-29ug-7/diodes-incorporated, Datasheet Link=https://www.diodes.com//assets/Datasheets/APX811_812.pdf, Height=1.1mm, Manufacturer_Part_Number=APX812-29UG-7, Mouser Price/Stock=https://www.mouser.co.uk/ProductDetail/Diodes-Incorporated/APX812-29UG-7?qs=uwE%252BXfKqZqTVBV%252BbZr8J2A%3D%3D

## Via types
v1: diameter 40, hole 30, Top Layer to Bottom Layer, 17 vias
v2: diameter 50, hole 28, Top Layer to Bottom Layer, 11 vias

## Nets (pads, with @x,y where several pads share a name; then routed paths per layer and width w, separated by ;. In a path a pad name is that pad's centre, name@x,y a point inside that pad or via, vN(x,y) a via of type N, cw(c..) or ccw(c..) an arc to the next point about the centre after c; other vN are vias at no path point)
CLK: General.12 R.06 | length 1293.7
  Top Layer w15: R.06 625,2642.72 602.36,2620.08 602.36,2328.7 962.2,1968.85 General.12
CLKO: General.40 R5.1 | length 475.9
  Top Layer w15: General.40 2439.37,1556.69 2496.24,1499.82 2696.67,1499.82 2743.16,1546.31 R5.1
GND: BL0.2 BL1.2 BL2.2 BL3.2 BL4.2 Bufr.2 Cd1.2 Cd4.2 Cd5.2 Cd6.2 Cd7.2 Cd8.2 Cd9.2 Cd10.2 Cd11.2 Cd12.2 Cd13.2 Cd14.2 Cd15.2 Cin1.1 Cin2.1 Cin3.1 Cout1.1 Cout2.1 Cout3.1 D.01 L.08 LCD.1 LCD.4 Mem.4 MR.1 Osc.2 R1V.2 R3V.2 R18V.2 R.08 RL0.2 RL1.2 RL2.2 RL3.2 RL4.2 RL5.2 RL6.2 RL7.2 Rst.1 Supply.6 U.08 | length 1405.4
  Top Layer w15: Rst.1@889.76,818.99 Rst.1@897.54,826.77 ; v1(1643.7,974.41) 1650.47,974.41 1660.31,984.25 BL4.2 ; v1(2519.68,2450.79) 2526.45,2450.79 2537.47,2439.76 Cout3.1 ; 2539.37,1940.03 2548.16,1948.82 ; R18V.2 2615.35,2977.26 2645.12,3007.03 2652.7,3007.03 v1(2657.48,3011.81) ; v1@2699.93,1948.82 2709.77,1938.98 v1(2716.54,1938.98) v1@2716.54,1932.48 ; v1(2765.75,777.56) 2768.92,777.56 2798.45,748.03 BL2.2 ; v1(2785.43,462.6) 2834.65,413.39 BL3.2 ; v1(2832.28,1183.46) 2874.02,1141.73 BL1.2 ; Cd7.2 2846.46,3485.24 2855.22,3476.47 Cd7.2@2856.2,3476.47 ; 2874.02,1456.69 BL0.2 ; v1(2982.28,2460.63) 2989.05,2460.63 3000.07,2449.61 Cout2.1 ; R3V.2 3067.79,2929.99 v1(3110.24,2972.44) ; v1(3326.77,2440.94) 3409.25,2440.94 Cout1.1 ; RL5.2@3400.64,688.82 RL5.2@3402.61,690.79 ; RL4.2 3400.64,834.27 RL4.2@3415.46,849.09 ; RL2.2@3400.64,1220.63 RL2.2@3402.61,1218.66 ; R1V.2 3419.29,2887.8 v1(3513.78,2982.28)
  Bottom Layer w15: Cd13.2@1279.53,2411.42 1280.51,2411.42 1289.28,2402.65 Cd13.2@1289.28,2401.67
  other v1: 2834.65,1417.32
GPIO0: General.22 L.07 | length 1101.9
  Top Layer w15: General.22 1462.2,2141.34 1683.07,2362.2 1683.07,2483.86 L.07
GPIO1: General.24 L.06 | length 1218.9
  Top Layer w15: General.24 1562.2,2182.28 1722.44,2342.52 1722.44,2588.58 1668.31,2642.72 L.06
GPIO2: General.26 L.04 | length 1437.1
  Top Layer w15: L.04 1714.37,2842.72 1761.81,2795.28 1761.81,2322.83 1662.2,2223.23 General.26
GPIO3: General.28 L.01 | length 1714
  Top Layer w15: General.28 1762.2,1762.2 v2(1801.18,1801.18)
  Bottom Layer w15: L.01 1689.96,3142.72 1801.18,3031.5 v2(1801.18,1801.18)
GPIO4: General.20 U.07 | length 776.4
  Top Layer w15: General.20 1362.2,2169.29 1399.21,2206.3 U.07
GPIO5: General.18 U.06 | length 776.4
  Top Layer w15: General.18 1262.2,2187.4 1299.21,2224.41 U.06
GPIO6: General.16 U.04 | length 787.1
  Top Layer w15: U.04 1099.21,2259.06 1162.2,2196.06 General.16
GPIO7: General.14 U.01 | length 870
  Top Layer w15: U.01 799.21,2259.06 1062.2,1996.06 General.14
LCD_0: BL4.1 General.11 | length 1145.1
  Top Layer w15: General.11 962.2,1222.83 1003.94,1181.1 1262.45,1181.1 1401.26,1042.29 1752.99,1042.29 1764.35,1030.93 1764.35,1011.2 1765.7,1009.84 BL4.1
LCD_1: BL4.3 General.9 | length 1378.9
  Top Layer w15: General.9 862.2,1185.04 905.51,1141.73 1269.29,1141.73 1338.58,1072.44 1338.58,984.25 1417.32,905.51 1720.47,905.51 1761.44,946.48 1761.44,957.3 1762.8,958.66 BL4.3
LED0: BL0.1 General.27 | length 1271.6
  Top Layer w15: General.27 1762.2,1407.09 1791.34,1377.95 2677.17,1377.95 2795.28,1496.06 2894.38,1496.06 2903.17,1487.28 2903.17,1483.64 2904.53,1482.28 BL0.1
LED1: BL0.3 General.25 | length 1388.9
  Top Layer w15: General.25@1653.54,1429.13 1653.54,1377.95 1692.91,1338.58 2854.33,1338.58 2909.16,1393.42 2909.16,1429.74 2910.52,1431.1 BL0.3
LED2: BL1.1 General.23 | length 1562.7
  Top Layer w15: 1555.12,1422.22 1555.12,1338.58 1594.49,1299.21 2854.33,1299.21 2903.17,1250.37 2903.17,1168.68 2904.53,1167.32 BL1.1
LED3: BL1.3 General.21 | length 1727.7
  Top Layer w15: General.21 1456.69,1451.18 1456.69,1318.9 1515.75,1259.84 2736.22,1259.84 2775.59,1220.47 2775.59,1143.7 2803.15,1116.14 BL1.3
LED4: BL2.1 General.19 | length 2036.2
  Top Layer w15: General.19 1362.2,1354.33 1496.06,1220.47 2696.85,1220.47 2736.22,1181.1 2736.22,945.56 2903.17,778.61 2903.17,774.98 2904.53,773.62 BL2.1
LED5: BL2.3 General.17 | length 2281.7
  Top Layer w15: General.17 1262.2,1335.04 1293.7,1303.54 1353.94,1303.54 1476.38,1181.1 2657.48,1181.1 2696.85,1141.73 2696.85,767.72 2775.59,688.98 2881.89,688.98 2903.17,710.26 2903.17,721.08 2904.53,722.44 BL2.3
LED6: BL3.1 General.15 | length 2509.6
  Top Layer w15: General.15 1162.2,1298.43 1200.79,1259.84 1327.95,1259.84 1446.06,1141.73 2598.43,1141.73 2657.48,1082.68 2657.48,669.29 2886.44,440.33 2914,440.33 BL3.1
LED7: BL3.3 General.13 | length 2699
  Top Layer w15: General.13 1062.2,1280.32 1122.05,1220.47 1307.48,1220.47 1425.59,1102.36 2578.74,1102.36 2618.11,1062.99 2618.11,551.18 2781.5,387.8 BL3.3
MAIP: General.8 R.04 | length 1508.2
  Top Layer w15: R.04 586.81,2842.72 511.81,2767.72 511.81,2295.28 762.2,2044.88 General.8
MISO: D.08 General.34 Mem.2 | length 4821.9
  Top Layer w15: D.08 1499.21,3562.2 1685.04,3748.03 v2(2370.08,3748.03) ; General.34 2322.05,1816.54 2322.05,3164.57 ; v2(2370.08,3314.96) 2322.05,3266.93 2322.05,3164.57 ; Mem.2 3211.02,3381.89 2539.37,3381.89 2322.05,3164.57
  Bottom Layer w15: v2(2370.08,3314.96) v2(2370.08,3748.03)
MOSI: D.07 General.32 Mem.5 | length 5047.3
  Top Layer w15: D.07 1358.27,3308.66 1358.27,3395.67 ; v2(1428.89,3507.96) 1427.56,3506.63 1427.56,3464.96 1358.27,3395.67 ; General.32 2062.99,1657.48 v2(2062.99,1779.53) ; Mem.5 3009.45,3881.89 1641.73,3881.89 1358.27,3598.43 1358.27,3395.67
  Bottom Layer w15: v2(1428.89,3507.96) 1494.49,3573.56 1877.26,3573.56 2106.3,3344.53 2106.3,1822.83 v2(2062.99,1779.53)
NetAlimentacion_1: Cbp1.2 Cout1.2 R1V.5 Supply.1 | length 730.5
  Top Layer w19.68: Supply.1 3471.06,2129.33 Cout1.2@3471.06,2430.91 ; R1V.5 3444.88,2748.03 3445.87,2747.05 3453.96,2747.05 3466.66,2734.35 3466.66,2577.13 3471.7,2572.09 3478.59,2572.09 3502.81,2547.87 3502.81,2471.11 3480.32,2448.62 3472.44,2448.62 3471.46,2447.64 Cout1.2
NetAlimentacion_3: Cbp2.2 Cout2.2 R3V.5 Supply.3 | length 772.7
  Top Layer w19.68: R3V.5 3093.38,2705.9 3122.84,2676.44 Cout2.2@3122.84,2458.46 ; Cout2.2 3122.44,2379.53 3328.35,2173.62 Supply.3
NetAlimentacion_5: Cbp3.2 Cout3.2 R18V.5 Supply.5 | length 1078.7
  Top Layer w19.68: R18V.5 2640.94,2614.96 Cbp3.2@2651.77,2604.13 ; Cout3.2 Cout3.2@2651.77,2439.76 ; Cbp3.2 Cout3.2@2651.77,2439.76 ; Supply.5 2875.2,2439.76 Cout3.2@2651.77,2439.76
NetBL0_4: BL0.4 D1.2 | length 134.9
  Top Layer w15: BL0.4 2999.69,1431.1 3001.05,1429.74 3001.05,1408.4 3031.5,1377.95 D1.2
NetBL0_6: BL0.6 D0.2 | length 134.9
  Top Layer w15: BL0.6 2999.69,1482.28 3001.05,1483.64 3001.05,1504.98 3031.5,1535.43 D0.2
NetBL1_4: BL1.4 D3.2 | length 150.1
  Top Layer w15: BL1.4 2999.69,1116.14 3001.05,1114.78 3001.05,1095.41 3051.26,1045.2 3070.49,1045.2 3088.39,1027.3 D3.2@3088.39,1023.62
NetBL1_6: BL1.6 D2.2 | length 141.9
  Top Layer w15: BL1.6 2999.69,1167.32 3001.05,1168.68 3001.05,1188.05 3049.28,1236.29 3086.68,1236.29 D2.2
NetBL2_4: BL2.4 D5.2 | length 134.9
  Top Layer w15: BL2.4 2999.69,722.44 3001.05,721.08 3001.05,699.74 3031.5,669.29 D5.2
NetBL2_6: BL2.6 D4.2 | length 134.9
  Top Layer w15: BL2.6 2999.69,773.62 3001.05,774.98 3001.05,796.32 3031.5,826.77 D4.2
NetBL3_4: BL3.4 D7.2 | length 134.9
  Top Layer w15: BL3.4 2999.69,387.8 3001.05,386.44 3001.05,365.1 3031.5,334.65 D7.2
NetBL3_6: BL3.6 D6.2 | length 134.9
  Top Layer w15: BL3.6 2999.69,438.98 3001.05,440.33 3001.05,461.68 3031.5,492.13 D6.2
NetBuffer_CLK_3: Bufr.3 Osc.3 | length 125.3
  Top Layer w15: Osc.3 2477.56,1935.83 2497.66,1915.73 2497.66,1903.92 Bufr.3
NetBuffer_CLK_4: Bufr.4 R5.2 | length 286.1
  Top Layer w15: Bufr.4 2501.97,1753.94 2641.16,1614.74 2661.66,1614.74 2674.16,1602.24 R5.2
NetCbp1_1: Cbp1.1 R1V.4 | length 173.9
  Top Layer w15: R1V.4 3393.76,2757.81 3393.76,2584.08 Cbp1.1
NetCbp2_1: Cbp2.1 R3V.4 | length 162.9
  Top Layer w15: R3V.4@3042.4,2755.53 3042.4,2596.74 Cbp2.1
NetCbp3_1: Cbp3.1 R18V.4 | length 199.4
  Top Layer w15: Cbp3.1 2586.32,2604.63 2586.32,2616.87 2589.76,2620.31 R18V.4
NetD0_1: D0.1 RL0.1 | length 123
  Top Layer w15: D0.1 RL0.1
NetD1_1: D1.1 RL1.1 | length 123
  Top Layer w15: D1.1 RL1.1
NetD2_1: D2.1 RL2.1 | length 118.1
  Top Layer w15: D2.1 RL2.1
NetD3_1: D3.1 RL3.1 | length 123
  Top Layer w15: D3.1@3223.48,1023.62 RL3.1
NetD4_1: D4.1 RL4.1 | length 103.3
  Top Layer w15: D4.1 RL4.1@3311.96,826.77
NetD5_1: D5.1 RL5.1 | length 123
  Top Layer w15: D5.1 RL5.1
NetD6_1: D6.1 RL6.1 | length 123
  Top Layer w15: D6.1 RL6.1
NetD7_1: D7.1 RL7.1 | length 123
  Top Layer w15: D7.1 RL7.1
NetMR_4: MR.4 Rst.3 | length 211.6
  Top Layer w15: MR.4 702.28,895.67 714.09,883.86 Rst.3@811.02,883.86
NetOscilador_1: Osc.1 R4.1 | length 120.1
  Top Layer w15: Osc.1 2694.83,2079.72 R4.1
NetR1_2: R1.2 R1V.3 | length 117.5
  Top Layer w15: R1V.3 3393.7,2952.42 3406.2,2964.92 R1.2
NetR2_2: R2.2 R3V.3 | length 143.9
  Top Layer w15: R2.2@3007.01,2978.41 3007.01,2867.15 3015.8,2858.36 R3V.3@3035.98,2858.36
NetR3_2: R3.2 R18V.3 | length 147.8
  Top Layer w15: R3.2@2552.03,2996.51 2552.03,2910.57 2574.63,2887.97 2589.15,2887.97 2589.76,2887.36 R18V.3
POC_CTRL: General.10 R.05 | length 1393
  Top Layer w15: R.05 616.73,2742.72 559.06,2685.04 559.06,2310.38 862.2,2007.23 General.10
RST: General.6 R.03 | length 1624.8
  Top Layer w15: General.6 662.2,2090.24 468.5,2283.94 468.5,2862.2 549.02,2942.72 R.03
RSTO: General.7 Rst.2 | length 623.7
  Top Layer w15: General.7 762.2,1147.24 889.76,1019.69 Rst.2
RX: D.04 General.2 | length 2827
  Top Layer w15: General.2 462.2,2135.39 375.87,2221.72 375.87,3364.04 528.69,3516.86 1010.7,3516.86 1099.21,3428.35 D.04
SCL: BL4.6 LCD.5 | length 1139.8
  Top Layer w15: BL4.6 2186.61,1009.84 2263.78,932.68 2263.78,494.09 2224.41,454.72 2165.35,454.72 LCD.5@2066.93,553.15
SCLK: D.06 General.30 Mem.6 | length 5268.9
  Top Layer w15: D.06 1299.21,3610.24 1622.05,3933.07 3102.36,3933.07 3212.6,3822.83 3212.6,3783.46 Mem.6 ; General.30 1929.13,1623.62 v2(1929.13,1779.53)
  Bottom Layer w15: D.06 1506.71,3475.22 1790.23,3475.22 2012.15,3253.3 2012.15,1862.54 v2(1929.13,1779.53)
SCS_O: General.36 Mem.1 R.01 | length 6771.3
  Top Layer w15: General.36 2370.08,1764.57 ; v2(2430.87,1730.56) 2421.4,1730.56 2396.18,1755.78 2378.87,1755.78 2370.08,1764.57 ; Mem.1 3251.97,3322.83 2543.31,3322.83 2370.08,3149.61 2370.08,1764.57
  Bottom Layer w15: R.01 677.17,3145.67 677.17,3354.76 963.89,3641.49 1946.32,3641.49 2200.26,3387.55 2200.26,1791.86 2295.28,1696.85 2397.16,1696.85 v2(2430.87,1730.56)
SDA: BL4.4 LCD.6 | length 396
  Top Layer w15: BL4.4 1848.43,871.65 LCD.6@2066.93,653.15
TX: D.02 General.4 | length 2517.9
  Top Layer w15: General.4 562.2,2132.25 425.2,2269.26 425.2,3330.71 562.99,3468.5 822.83,3468.5 899.21,3392.13 D.02
VDD10: Cd8.1 Cd9.1 Cd10.1 Cd11.1 D.03 L.02 L.03 R.02 Supply.8 U.02 U.03 | length 3732.5
  Top Layer w19.68: Cd9.1 580.71,3050.2 585.63,3045.28 594.6,3045.28 597.16,3042.72 766.34,3042.72 797.24,3011.81 ; 836.61,2480.31 807.09,2450.79 807.09,2409.84 U.02 ; Cd8.1 910.63,3179.13 D.03 1053.15,3213.78 1053.15,3179.13 ; 885.83,2491.34 885.83,2952.76 953.54,3020.47 1012.6,3020.47 ; Cd11.1 914.37,2214.57 909.45,2219.49 909.45,2220.78 899.21,2231.02 U.02 ; U.03 U.02 ; 1181.1,2923.23 1334.85,2923.23 ; 1190.94,2952.76 1200.98,2942.72 ; 1397.64,3011.81 1428.54,3042.72 L.02 L.03 1702.56,2942.72 ; Cd10.1 1722.44,2962.6 1702.56,2942.72 ; 1860.24,2883.86 1761.42,2883.86 1702.56,2942.72 ; 1948.82,2307.78 2051.88,2204.72 v2(2263.78,2204.72)
  Bottom Layer w19.68: v2(2263.78,2204.72) 2266.7,2207.64 2815.98,2207.64 3037.01,1986.61 Supply.8
VDD18: Bufr.5 Cd1.1 Cd7.1 Cd12.1 Cd13.1 Cd14.1 Cd15.1 D.05 L.05 Mem.3 Mem.7 Mem.8 Osc.4 R4.2 R.07 Supply.2 U.05 | length 7505.5
  Top Layer w19.68: D.05 1200,3268.5 1200,3345.67 Cd12.1 ; Cd15.1 1578.35,2696.85 L.05 ; v2(1785.81,3299.44) 1785.81,3392.6 2034.94,3641.73 2809.06,3641.73 2875.98,3574.8 ; Bufr.5 2541.34,1799.21 2541.34,1770.6 2593.16,1718.77 ; Osc.4 2578.57,2013.75 2695.84,2013.75 R4.2 2817.96,2012.74 2858.27,1972.44 2858.27,1724.41 ; Cd1.1 2735.24,1766.73 2735.24,1765.75 2688.26,1718.77 2593.16,1718.77 ; Cd7.1@2852.2,3551.02 2875.98,3574.8 ; v1(2937.01,3574.8) 2875.98,3574.8 ; Supply.2 3428.35,1900.79 3251.97,1724.41 2858.27,1724.41 ; 2593.16,1718.77 2642.65,1669.29 2803.15,1669.29 2858.27,1724.41
  Bottom Layer w19.68: Cd14.1 720.08,2588.58 R.07 736.61,2480.31 846.46,2480.31 ; 1181.1,2450.79 1189.96,2450.79 1224.41,2416.34 1225.39,2416.34 Cd13.1 1230.31,2357.56 1199.21,2326.46 U.05 ; D.05 1199.21,3200.39 1240.16,3159.45 ; 1368.11,3011.81 1655.73,3299.44 v2(1785.81,3299.44) ; 1392.72,2800.2 1450.2,2742.72 L.05 ; v1(2937.01,3574.8) 2940.16,3577.95 Mem.7@3107.09,3577.95 ; Mem.8 Mem.7 3263.88,3581.1 3363.51,3680.73 3409.86,3680.73 Mem.3 ; Mem.3@3411,3680.73 3411.19,3680.53 3504.51,3680.53 3641.73,3543.31 3641.73,2067.72 3560.63,1986.61 Supply.2@3429.41,1986.61
VDD30: BL0.5 BL1.5 BL2.5 BL3.5 BL4.5 Cd4.1 Cd5.1 Cd6.1 LCD.2 LCD.3 LCD.7 Rst.4 Supply.4 | length 8580.3
  Top Layer w15: Rst.4@806.59,806.71 804.74,806.71 804.74,804.74 773.61,773.61 773.61,696.86 792.93,677.54 792.93,676.56 800.2,669.29 Cd5.1 801.18,620.08 870.08,551.18 v2(1161.42,551.18) ; BL4.5 1944.88,984.25 1979.13,950 v2(1979.13,892.91) ; BL3.5 3317.7,413.39 v1(3319.5,411.59) ; BL1.5 v1(3149.61,1141.73) ; BL0.5 v1(3484.25,1456.69) ; BL2.5@3000,748.03 v1(3295.74,748.03)
  Bottom Layer w15: v2(1161.42,551.18) 1342.93,551.18 1444.24,652.49 LCD.2@1869.42,652.49 ; LCD.2@1864.81,658.42 1864.81,842.77 1914.95,892.91 v2(1979.13,892.91) ; LCD.3@1966.93,553.15 1966.93,475.98 1988.19,454.72 2125.98,454.72 2165.35,494.09 LCD.7@2165.35,551.57 ; Cd4.1 2013.39,927.17 v2(1979.13,892.91) ; v1(3149.61,1141.73) 3464.57,1141.73 ; v1@3296.33,748.61 3488.77,748.61 ; v1(3319.5,411.59) 3321.64,409.45 3476.38,409.45 ; Cd6.1 3474.41,925.2 ; Supply.4 3328.35,1789.76 3543.31,1574.8 ; 3500,1582.68 3484.25,1566.93 v1(3484.25,1456.69) 3519.69,1421.26 3519.69,779.53 3488.77,748.61 ; v2(1979.13,892.91) 1979.13,799.51 2018.45,760.2 2214.7,760.2 2263.78,711.12 2263.78,590.55 2226.38,553.15 LCD.7 2546.06,177.17 3452.76,177.17 3519.69,244.09 3519.69,366.14 3476.38,409.45 ; 3476.38,409.45 3486.53,419.6 3486.53,746.37 3488.77,748.61
Vin: Cin1.2 Cin2.2 Cin3.2 R1.1 R1V.1 R2.1 R3.1 R3V.1 R18V.1 Supply.7 | length 3088.9
  Top Layer w19.43: R1V.1@3445.87,2854.33 R1V.1@3445.99,2854.33
  Top Layer w19.68: 2429.92,3054.57 2429.92,2337.63 2488.42,2279.13 2935.83,2279.13 Supply.7 ; R3.1@2550.51,3067.17 2550.51,3149.72 ; R18V.1 2640.94,2882.68 2643.9,2885.63 2653.74,2885.63 2736.22,2968.11 2736.22,3136.87 ; 2736.22,3160.43 Cin3.2 ; R2.1@3011.58,3058.29 3011.58,3171.03 3011.81,3171.26 ; R3V.1 3093.38,2861.22 3096.33,2864.17 3106.17,2864.17 3198.82,2956.82 3198.82,3128.69 ; 3198.82,3171.26 Cin2.2 ; 3395.67,3179.13 Cin1.2 ; R1.1 3407.9,3137.64 3419.61,3149.35 3483.68,3149.35 3602.11,3030.92 3602.11,2941.61 3514.83,2854.33 R1V.1@3445.99,2854.33
pads on no net: Bufr.1 Bufr.6 General.1 General.3 General.5 General.29 General.31 General.33 General.35 General.37 General.38 General.39 LCD.8 MR.2 MR.3

## Polygon pours and split planes (outlines as drawn)
GND on Bottom Layer "GND_L02_P017" (solid, remove dead copper, pour order 17): 0,4133.86 3937,4133.86 3937,0.18 0,0.18
VDD30 on Bottom Layer "VDD30_L02_P014" (solid, remove dead copper, pour order 14): 3456.69,1602.36 3515.75,1661.42 3633.86,1661.42 3685.04,1610.24 3685.04,232.28 3622.05,169.29 3531.5,169.29 3456.69,244.09
VDD18 on Bottom Layer "VDD18_L02_P015" (solid, remove dead copper, pour order 15): 1348.51,2634.62 1141.73,2393.49 905.51,2393.49 816.93,2496.79 816.93,3075.52 925.2,3169.29 1348.51,3169.29 1476.38,3041.42 1476.38,2834.65 1348.51,2735.53
VDD18 on Bottom Layer "VDD18_L02_P013" (solid, remove dead copper, pour order 13): 3541.97,3589.07 3600.78,3647.88 3691.81,3647.88 3750.63,3589.07 3750.63,2057.55 3677.49,1984.41 3619.91,1984.41 3546.77,2057.55
GND on Top Layer "GND_L01_P020" (solid, pour order 20): 3937,4133.86 0,4133.86 0,0.18 3937,0.18
Vin on Top Layer "VIN_L01_P016" (solid, remove dead copper, pour order 16): 2471.96,3067.81 2518.23,3114.08 3444.88,3114.08 3461.97,3131.17 3461.97,3164.01 3444.88,3181.1 2490.94,3181.1 2410.71,3100.87 2410.71,3006.56
VDD10 on Top Layer "VDD10_L01_P019" (solid, remove dead copper, pour order 19): 885.83,2411.42 757.87,2568.9 757.87,2972.44 856.3,3100.39 978.98,3100.39 1048.99,3198.82 1168.07,3198.82 1230.32,3100.39 1446.38,3001.97 1446.38,2864.17 1230.32,2775.59 1230.32,2598.43 1088.15,2411.42
VDD10 on Top Layer "VDD10_L01_P018" (solid, remove dead copper, pour order 18): 1850.39,3149.61 1879.92,3188.98 1938.98,3188.98 1968.5,3149.61 1968.5,2332.68 1929.13,2282.89 1909.45,2282.89 1889.76,2282.89 1850.39,2332.68

## Silkscreen, mask and mechanical layers (free items; w line width, h text height)
Top Overlay:
  drawing of 46 lines, arcs and shapes, not listed
  text "Escuela de Ingenieria en Electronica" at 84.85,3651.96 h78.74
  text "Sebastian Barrantes Perez" at 99.48,276.3 h78.74
  text "Hender Valdivia Mejias" at 96.84,179.12 h78.74
  text "Christopher Quiros Cisneros" at 96.84,92.74 h78.74